# EAGLE board Scematic (EAGLE 4.16)
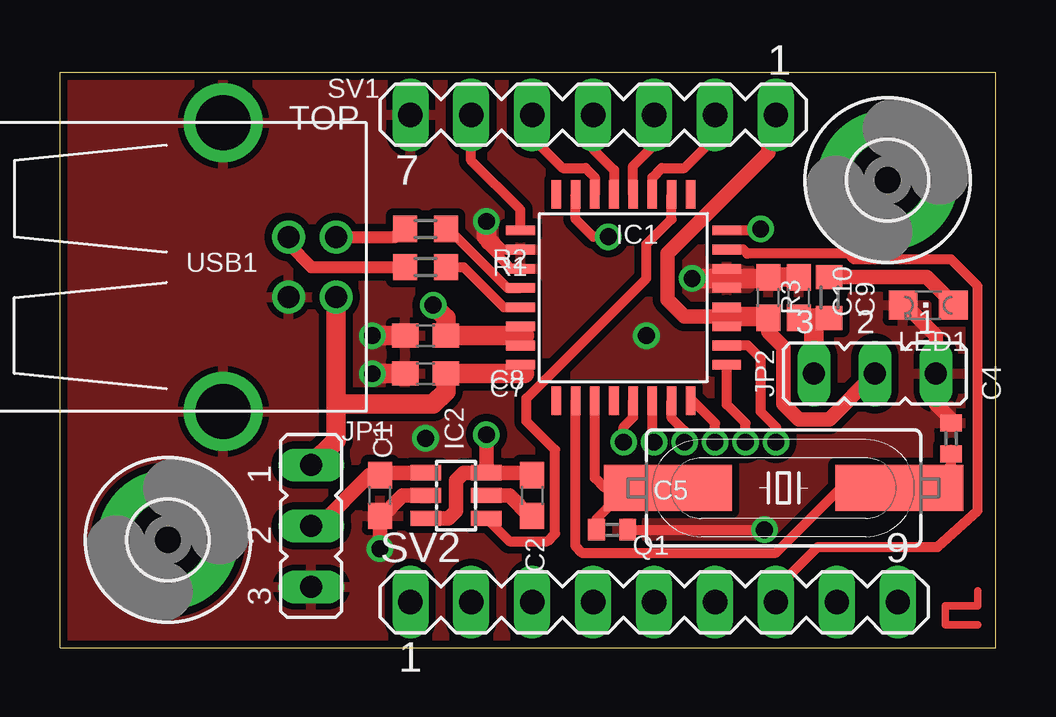
[diagram p0: board, top side]
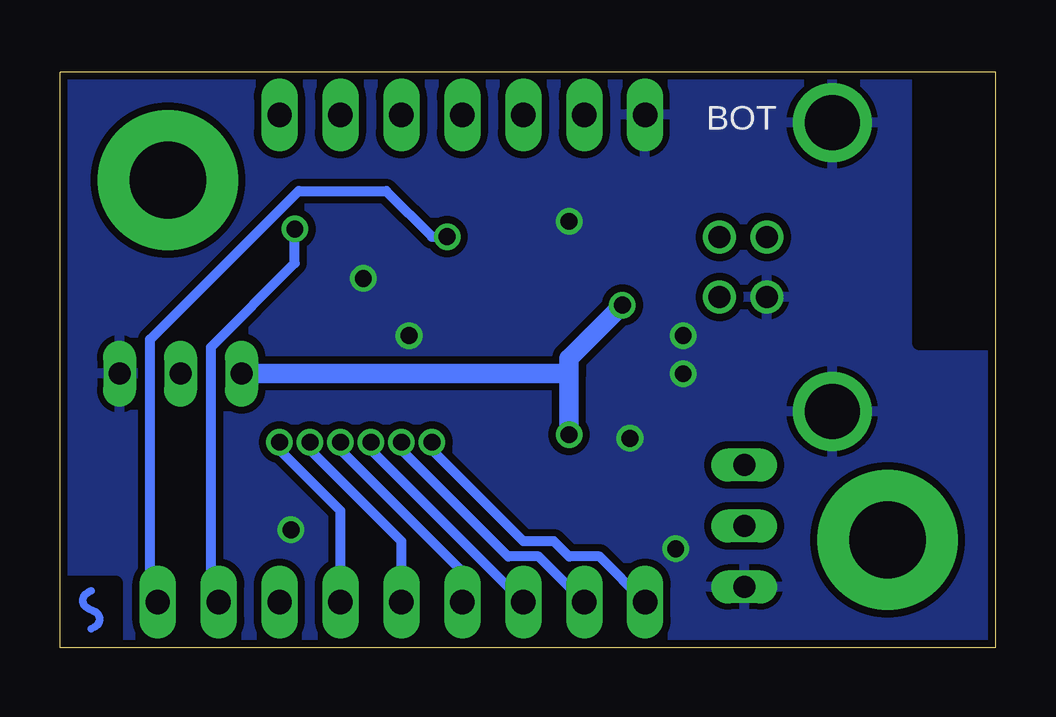
[diagram p1: board, bottom side, seen from below]

Size 39 x 24 mm. Coordinates in mm from the lower left corner, seen from the top.
Outline: 0,0 39,0 39,24 0,24 0,0
Copper layers (1*16): Top 0.035mm / dielectric 1.5mm / Bottom 0.035mm
Design rules "Fischer": minimum track width 10mil, minimum drill 0.6mm, track to track 0.15mm, track to pad 0.15mm, pad to pad 0.15mm, via to via 0.15mm, smd to smd 0.15mm, copper to edge 8mil, drill to drill 8mil, minimum pad ring 8mil, minimum via ring 8mil, stop-mask expansion 4mil, vias tented up to drill 0mil, thermal gap 10mil
Net classes: 1 power: width 0.61 mm
tRestrict: area 36.7,0.5 to 38.7,2.7
bRestrict: area 2.7,13.2 to 2.8,13.5; area 2.7,14 to 2.8,15; area 2.7,13.2 to 2.7,13.5; area 2.7,14 to 2.7,15; area 2.6,13.2 to 2.7,13.5; area 2.6,14 to 2.7,15; area 2.6,13.2 to 2.6,13.5; area 2.6,14 to 2.6,15; area 2.6,13.2 to 2.6,13.5; area 2.6,14 to 2.6,15; area 2.5,13.2 to 2.6,13.5; area 2.5,14 to 2.6,15; 89 more areas
Milling: 4 lines

## Footprints (pad centres in the part's own frame; a part is rotated, then mirrored left to right if it is on the bottom)
C0603 = smd 1.1 x 1: 1 -0.85,0; 2 0.85,0
C0402 = smd 0.7 x 0.9: 1 -0.65,0; 2 0.65,0
3,2-PAD = drill 3.2 pad 5.842 round: B3,2 0,0
LQFP32 = smd 0.4 x 1.2: 1 -2.8,-4.3; 2 -2,-4.3; 3 -1.2,-4.3; 4 -0.4,-4.3; 5 0.4,-4.3; 6 1.2,-4.3; 7 2,-4.3; 8 2.8,-4.3; 17 2.8,4.3; 18 2,4.3; 19 1.2,4.3; 20 0.4,4.3; 21 -0.4,4.3; 22 -1.2,4.3; 23 -2,4.3; 24 -2.8,4.3 | smd 1.2 x 0.4: 9 4.3,-2.8; 10 4.3,-2; 11 4.3,-1.2; 12 4.3,-0.4; 13 4.3,0.4; 14 4.3,1.2; 15 4.3,2; 16 4.3,2.8; 25 -4.3,2.8; 26 -4.3,2; 27 -4.3,1.2; 28 -4.3,0.4; 29 -4.3,-0.4; 30 -4.3,-1.2; 31 -4.3,-2; 32 -4.3,-2.8
SOT23-6 = smd 0.635 x 1.27: P$1 -0.953,-1.27; P$2 0,-1.27; P$3 0.953,-1.27; P$4 0.953,1.27; P$5 0,1.27; P$6 -0.953,1.27
JP2 = drill 0.914 long: 1 -2.54,0; 2 0,0; 3 2.54,0
CHIPLED_0805 = smd 1.2 x 1.2: A 0,-1.05; C 0,1.05
HC49UP = smd 5.334 x 1.93: 1 -4.826,0; 2 4.826,0
R0603 = smd 1 x 1.1: 1 -0.85,0; 2 0.85,0
MA07-1 = drill 1.016 long: 1 -7.62,0; 2 -5.08,0; 3 -2.54,0; 4 0,0; 5 2.54,0; 6 5.08,0; 7 7.62,0
MA09-1 = drill 1.016 long: 1 -10.16,0; 2 -7.62,0; 3 -5.08,0; 4 -2.54,0; 5 0,0; 6 2.54,0; 7 5.08,0; 8 7.62,0; 9 10.16,0
USB-B-H = drill 0.914 round: D+ 0,1.25; D- 1.981,1.25; GND 0,-1.25; VBUS 1.981,-1.25 | drill 2.286 round: GND@1 -2.718,6.02; GND@2 -2.718,-6.02

## Placement (x,y rotation side)
C1  2,2µ  [C0603]  13.34,6.35 270 top
C2  1µ  [C0603]  19.68,6.35 270 top
C4  18p  [C0402]  37.15,8.73 90 top
C5  18p  [C0402]  23.02,4.92 0 top
C7  2,2µ  [C0603]  15.24,11.43 180 top
C8  1µ  [C0603]  15.24,13.02 180 top
C9  2,2µ  [C0603]  30.8,14.61 90 top
C10  1µ  [C0603]  29.53,14.61 90 top
H1  MOUNT-PAD-ROUND3.2  [3,2-PAD]  4.5,4.5 0 top
H2  MOUNT-PAD-ROUND3.2  [3,2-PAD]  34.5,19.5 0 top
IC1  MAX3420E  [LQFP32]  23.5,14.61 90 top
IC2  MAX6349  [SOT23-6]  16.51,6.35 270 top
JP1  [JP2]  10.48,5.08 270 top
JP2  [JP2]  33.97,11.43 180 top
LED1  [CHIPLED_0805]  36.2,14.29 90 top
Q1  12MHz  [HC49UP]  30.16,6.67 0 top
R1  33,2 1%  [R0603]  15.24,15.88 0 top
R2  33,2 1%  [R0603]  15.24,17.46 0 top
R3  150  [R0603]  32.07,14.61 270 top
SV1  [MA07-1]  22.23,22.23 180 top
SV2  [MA09-1]  24.77,1.91 0 top
USB1  USB-B-H  [USB-B-H]  9.53,15.88 0 top

## Library data of the parts
C1 C2 C4 C5 C7-C10 R1-R3 = rcl
H1 H2 = holes
IC1 IC2 = MAXIM
JP1 JP2 = jumper
LED1 = led
Q1 = crystal
SV1 SV2 = con-lstb
USB1 = con-usb-2

## Nets
+3V3: C2.1 C8.1 C9.1 IC1.22 IC1.23 IC2.P$3 IC2.P$6 JP2.3 R3.2
/CS: IC1.12 SV1.3
/RES: IC1.10 IC2.P$4
GND: C1.2 C4.2 C5.2 C7.2 C8.2 C9.2 C10.2 IC1.5 IC1.6 IC1.18 IC1.19 IC2.P$2 JP1.3 JP2.1 LED1.C SV1.7 USB1.GND USB1.GND@1 USB1.GND@2
GPI0: IC1.29 SV2.1
GPI1: IC1.30 SV2.2
GPI2: IC1.31 SV2.3
GPI3: IC1.32 SV2.4
GPO0: IC1.1 SV2.5
GPO1: IC1.2 SV2.6
GPO2: IC1.7 SV2.7
GPO3: IC1.8 SV2.8
GPX: IC1.15 SV2.9
INT: IC1.17 SV1.6
MISO: IC1.13 SV1.4
MOSI: IC1.14 SV1.5
N$1: C2.2 IC2.P$5
N$3: C1.1 IC2.P$1 JP1.2
N$4: IC1.20 R2.2
N$6: LED1.A R3.1
N$7: R2.1 USB1.D-
N$8: IC1.21 R1.2
N$9: R1.1 USB1.D+
N$11: C5.1 IC1.27 Q1.1
N$12: C4.1 IC1.26 Q1.2
SCLK: IC1.11 SV1.2
VBUS: C7.1 IC1.24 JP1.1 USB1.VBUS
VL [power]: C10.1 IC1.3 IC1.4 JP2.2 SV1.1

## Tracks (layer width: path | path; a pad name or v marks a point on that pad's centre or on a via)
+3V3  (via drill 0.7)
  Top 0.406: IC1.23 19.2,12.85 19.37,13.02 19.2,13.19 IC1.22
  Top 0.61: C2.1 19.68,7.3 IC2.P$6 | IC2.P$3 16.19,5.4 16.51,5.71 16.51,6.99 16.83,7.3 IC2.P$6 | IC2.P$6 v17.78,8.89
  Top 0.813: C9.1 30.8,13.81 30.85,13.76 31.43,13.76 | 31.43,13.76 R3.2 | C8.1 16.09,13.76 v15.56,14.29 | C8.1 16.03,13.02 | C8.1 19.37,13.02 | JP2.3 31.43,13.76
  Bottom 0.813: v17.78,8.89 17.78,11.43 | 17.78,11.43 17.78,12.06 v15.56,14.29 | 17.78,11.43 JP2.3
/CS
  Top 0.406: IC1.12 23.89,20.09 24.77,20.95 SV1.3
/RES
  Top 0.406: IC2.P$4 18.73,4.45 20.32,4.45 20.64,4.76 20.64,8.26 19.45,9.45 19.45,10.4 20.64,11.59 24.45,15.4 24.45,16.83 25.5,17.88 IC1.10
GND  (via drill 0.7)
  Top 0.406: IC1.19 18.8,15.8 17.78,16.83 17.78,17.14 | IC1.5 27.8,15.23 27.62,15.4 27.8,15.57 IC1.6 | C5.2 v29.37,4.92 | IC1.18 18.48,16.61 17.78,17.3
  Top 0.61: IC2.P$2 14.29,6.35 13.34,5.4 C1.2 v13.34,4.13 | LED1.C 35.24,14.29 36.51,13.02 JP2.1 36.51,10.16 37.15,9.53 C4.2
  Top 0.813: 17.78,17.14 17.78,17.3 v17.78,17.78 | C9.2 30.8,15.4 30.74,15.46 C10.2 29.53,15.4 27.62,15.4 v26.35,15.4 | C8.2 v13.02,13.02 | C7.2 v13.02,11.43
  other vias: 24.45,13.02 15.24,8.73
  pour Bottom (isolate 0.305): 0,24.13 39.37,24.13 39.37,0 0,0
  pour Top (isolate 0.305): 0,24.13 39.37,24.13 39.37,0 0,0
GPI0  (via drill 0.7)
  Top 0.406: IC1.29 23.89,9.61 23.5,9.21 v23.5,8.57
  Bottom 0.406: v23.5,8.57 23.5,8.26 19.68,4.45 18.41,4.45 17.78,3.81 16.51,3.81 SV2.1
GPI1  (via drill 0.7)
  Top 0.406: IC1.30 24.7,8.64 v24.77,8.57
  Bottom 0.406: v24.77,8.57 24.77,8.26 20.32,3.81 19.05,3.81 SV2.2
GPI2  (via drill 0.7)
  Top 0.406: IC1.31 25.5,9.59 26.04,9.05 v26.04,8.57
  Bottom 0.406: v26.04,8.57 26.04,8.26 SV2.3
GPI3  (via drill 0.7)
  Top 0.406: IC1.32 26.37,10.3 27.3,9.37 v27.3,8.57
  Bottom 0.406: v27.3,8.57 27.3,8.26 22.23,3.17 SV2.4
GPO0  (via drill 0.7)
  Top 0.406: IC1.1 27.8,10.15 28.57,9.37 v28.57,8.57
  Bottom 0.406: v28.57,8.57 28.57,8.26 24.77,4.45 SV2.5
GPO1  (via drill 0.7)
  Top 0.406: IC1.2 28.67,12.61 29.21,12.06 29.21,9.84 29.84,9.21 v29.84,8.57
  Bottom 0.406: v29.84,8.57 29.84,8.26 27.3,5.71 SV2.6
GPO2
  Top 0.406: SV2.7 30.32,2.94 31.59,4.21 36.59,4.21 38.26,5.71 38.26,15.08 37.15,16.19 33.1,16.19 32.86,16.43 28.65,16.43 28.48,16.61 IC1.7
GPO3  (via drill 0.7)
  Top 0.406: IC1.8 29.15,17.41 v29.21,17.46
  Bottom 0.406: SV2.8 32.38,2.54 32.7,2.86 32.7,12.54 29.21,16.03 v29.21,17.46
GPX  (via drill 0.7)
  Top 0.406: IC1.15 21.5,17.88 22.23,17.14 v22.86,17.14
  Bottom 0.406: SV2.9 34.92,2.7 35.24,3.02 35.24,12.86 29.05,19.05 25.4,19.05 23.5,17.14 v22.86,17.14
INT
  Top 0.406: IC1.17 19.2,18.27 17.14,20.32 SV1.6
MISO
  Top 0.406: IC1.13 23.09,19.93 22.23,20.8 SV1.4
MOSI
  Top 0.406: IC1.14 22.3,19.61 21.91,20 20.95,20 19.68,21.27 SV1.5
N$1
  Top 0.61: C2.2 19.58,5.5 18.73,6.35 IC2.P$5
N$3
  Top 0.61: IC2.P$1 13.34,7.3 C1.1 12.91,7.2 10.79,5.08 JP1.2
N$4
  Top 0.406: R2.2 16.19,17.46 18.65,15.01 IC1.20
N$6
  Top 0.61: LED1.A 37.24,14.35 36.14,15.46 R3.1
N$7
  Top 0.508: R2.1 14.29,17.46 13.95,17.12 USB1.D-
N$8
  Top 0.406: IC1.21 18.5,14.21 16.83,15.88 R1.2
N$9
  Top 0.508: USB1.D+ 9.53,16.83 10.48,15.88 R1.1
N$10
  Top 0.305: 38.26,0.95 36.91,0.95 36.91,1.75 38.26,1.75 38.26,2.38
N$11
  Top 0.406: IC1.27 22.3,7.07 22.7,6.67 23.5,6.67 | Q1.1 25.24,6.67 23.5,6.67 | 23.5,6.67 23.5,6.51 22.37,5.38 C5.1
N$12
  Top 0.406: IC1.26 21.5,4.22 21.75,3.97 29.84,3.97 32.54,6.67 34.92,6.67 Q1.2 36.2,6.67 37.15,7.62 C4.1 37.15,8.26
N$13
  Bottom 0.305: 37.7,0.79 37.54,0.87 arc-127 37.54,1.51 arc0 37.86,1.67 arc111 37.94,2.22 arc18 37.7,2.38
SCLK
  Top 0.406: IC1.11 24.7,19.61 25.08,20 26.04,20 27.3,21.27 SV1.2
VBUS
  Top 0.406: IC1.24 19.2,11.6 19.37,11.43
  Top 0.813: 19.37,11.43 C7.1 16.09,10.69 15.56,10.16 11.51,10.16 | 11.51,10.16 11.51,8.65 JP1.1 | 11.51,10.16 USB1.VBUS
VL
  Top 0.406: 27.8,13.98 | 27.8,13.98 27.78,13.97 | IC1.3 27.8,13.64 27.62,13.81 27.8,13.98 | 27.8,13.98 IC1.4
  Top 0.61: C10.1 29.53,13.18 30.16,12.54 30.16,10.16 30.8,9.53 32.07,9.53 JP2.2 | SV1.1 29.53,20.88 29.53,20.64 25.32,16.43 25.32,14.53 26.04,13.81 27.62,13.81
  Top 0.813: C10.1 29.53,13.81 27.62,13.81

## Text on the board
tPlace: TOP
bPlace: BOT
bStop: INOSENS
bRestrict: INOSENS
Measures: 39 mm | 24 mm | 4,5 mm | 4,5 mm
201bmp: C:/Dokumente und Einstellungen/Olaf/Eigene Dateien/Eigene Bilder/headerbottom1.bmp
Kamera: 20 17 | 1 15 | 21 15 | 19 20 | 18 25 | 2 40 | 17 25 | 3 45 | 16 20 | 4 50 | 15 17 | v1 0 | v10 0 | v11 0 | v12 0 | v13 0 | v14 0 | v15 0 | v16 0 | v17 0 | v18 0 | v19 0 | v2 0 | v20 0 | v21 0 | v3 0 | v4 0 | v5 0 | v6 0 | v7 0 | v8 0 | v9 0 | 5 50 | 14 15 | 6 45 | 13 10 | 7 40 | 12 15 | 8 25 | 9 20 | 11 15 | 10 20